# EAGLE board DRV8839 (EAGLE 6.5.0)
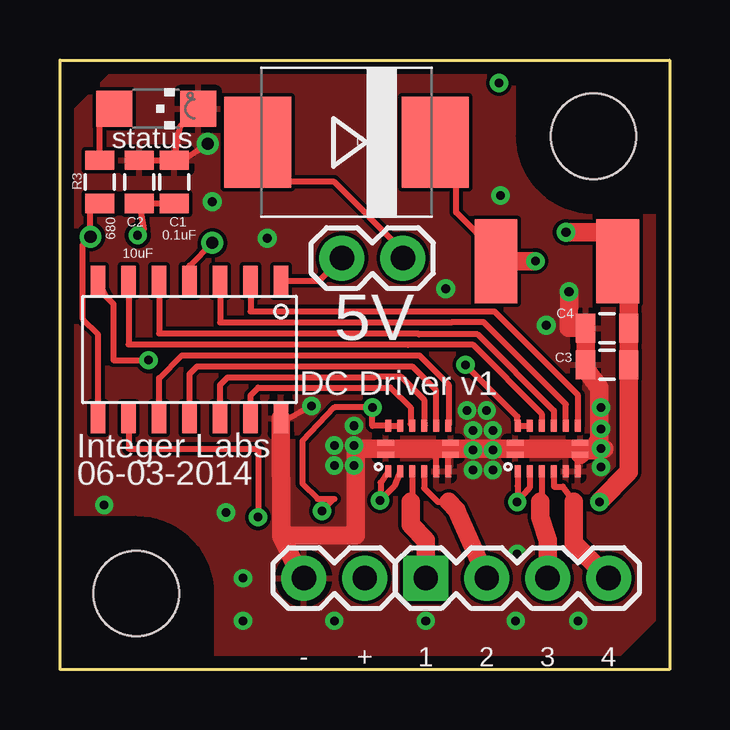
[diagram p0: board, top side]
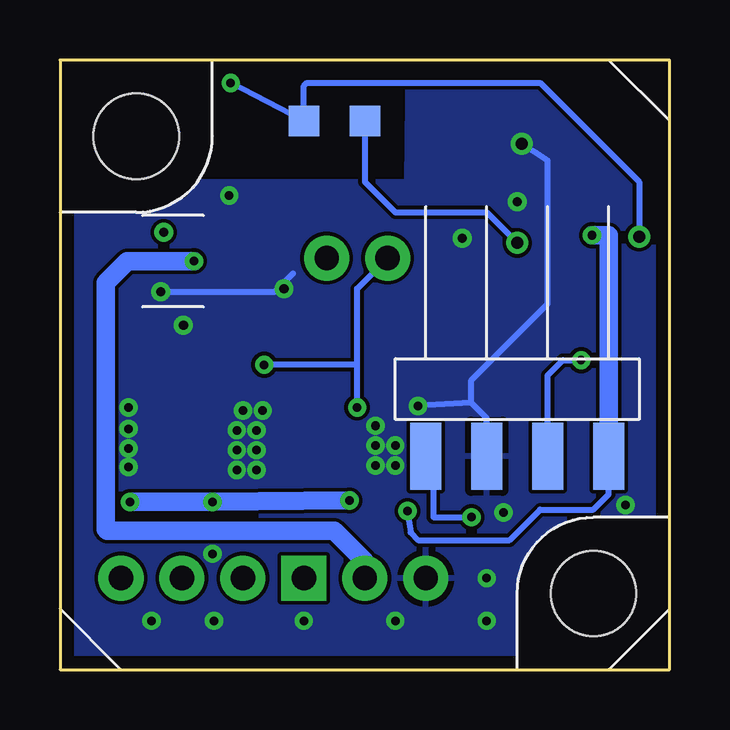
[diagram p1: board, bottom side, seen from below]

Size 25.4 x 25.4 mm. Coordinates in mm from the lower left corner, seen from the top.
Copper layers (1*16): Top 0.0178mm / dielectric 59mil / Bottom 0.0178mm
Design rules "SSC-EAGLE-2Lyr_v1.0.0.3": minimum track width 6mil, minimum drill 14mil, track to track 6mil, track to pad 6mil, pad to pad 6mil, via to via 6mil, smd to smd 6mil, copper to edge 20mil, drill to drill 16mil, minimum pad ring 8mil, minimum via ring 8mil, stop-mask expansion 3mil, vias tented up to drill 0mil, thermal gap 10mil

## Footprints (pad centres in the part's own frame; a part is rotated, then mirrored left to right if it is on the bottom)
0805 = smd 0.8 x 1.2: 1 -0.9,0; 2 0.9,0
SMC = smd 2.8 x 3.8: A 3.7,0; C -3.7,0
1X04 = drill 1.016 pad 1.88 square: 1 0,0 | drill 1.016 pad 1.88: 2 2.54,0; 3 5.08,0; 4 7.62,0
1X02 = drill 1.016 pad 1.88: 1 0,0; 2 2.54,0
CHIPLED_1206 = smd 1.5 x 1.5: A 0,-1.75; C 0,1.75
WSON-POWERPAD-12 = smd 0.25 x 0.5: 1 -1.25,-0.95; 2 -0.75,-0.95; 3 -0.25,-0.95; 4 0.25,-0.95; 5 0.75,-0.95; 6 1.25,-0.95; 7 1.25,0.95; 8 0.75,0.95; 9 0.25,0.95; 10 -0.25,0.95; 11 -0.75,0.95; 12 -1.25,0.95 | smd 0.7 x 0.25: PAD1 -1.35,0.25; PAD2 -1.35,-0.25; PAD3 1.35,-0.25; PAD4 1.35,0.25
1812 = smd 1.778 x 3.505: P$1 -2.54,0; P$2 2.54,0
SOIC14 = smd 0.61 x 1.27: 1 0,-3.175; 2 1.27,-3.175; 3 2.54,-3.175; 4 3.81,-3.175; 5 5.08,-3.175; 6 6.35,-3.175; 7 7.62,-3.175; 8 7.62,2.54; 9 6.35,2.54; 10 5.08,2.54; 11 3.81,2.54; 12 2.54,2.54; 13 1.27,2.54; 14 0,2.54
FOOTPRINT = smd 1.27 x 1.27 bottom: MISO 15.24,22.86; RESET 12.7,22.86 | smd 1.295 x 2.794 bottom: P$1 2.54,8.89; P$2 5.08,8.89; P$3 7.62,8.89; P$4 10.16,8.89 | hole 3.556: 22.225,22.225; 3.175,3.175

## Placement (x,y rotation side)
C1  0.1uF  [0805]  4.76,20.32 270 top
C2  10uF  [0805]  3.3,20.32 270 top
C3  10 uF  [0805]  22.8,12.7 180 top
C4  0.1uF  [0805]  22.8,14.22 180 top
D1  [SMC]  11.94,21.97 180 top
JP1  [1X04]  15.24,3.81 0 top
JP2  M02PTH  [1X02]  12.7,3.81 180 top
JP3  M02PTH  [1X02]  14.29,17.14 180 top
LED  blue  [CHIPLED_1206]  4,23.37 270 top
R3  680  [0805]  1.65,20.32 270 top
U$1  DRV8839  [WSON-POWERPAD-12]  14.92,9.21 0 top
U$2  FUSE  [1812]  20.7,17.02 0 top
U$3  TINY841  [SOIC14]  9.21,13.02 180 top
U$4  FOOTPRINT  [FOOTPRINT]  0,0 0 top
U$5  DRV8839  [WSON-POWERPAD-12]  20.32,9.21 0 top

## Library data of the parts
C1-C4 = SparkFun-Capacitors
D1 = SparkFun-DiscreteSemi
JP1-JP3 = SparkFun-Connectors
LED = led
R3 = SparkFun-Passives
U$1-U$5 = IntegerLabs

## Nets
EN1: U$1.9 U$3.12
EN2: U$1.7 U$3.10
EN3: U$3.5 U$5.9
EN4: U$3.2 U$5.7
GND: C1.1 C2.1 C3.2 C4.2 JP2.2 LED.C U$1.5 U$1.6 U$1.PAD1 U$1.PAD2 U$1.PAD3 U$1.PAD4 U$3.14 U$4.P$3 U$5.5 U$5.6 U$5.PAD1 U$5.PAD2 U$5.PAD3 U$5.PAD4
IN1: U$1.10 U$3.13
IN2: U$1.8 U$3.11
IN3: U$3.6 U$5.10
IN4: U$3.3 U$5.8
MISO/LED: R3.2 U$3.8 U$4.MISO
N$3: D1.A JP3.1
N$5: LED.A R3.1
OUT1: JP1.1 U$1.3
OUT2: JP1.2 U$1.4
OUT3: JP1.3 U$5.3
OUT4: JP1.4 U$5.4
RESET: U$3.4 U$4.RESET
SCL/SCK: U$3.9 U$4.P$4
SDA/MOSI: U$3.7 U$4.P$2
VCC: C1.2 C2.2 JP3.2 U$1.11 U$1.12 U$3.1 U$4.P$1 U$5.11 U$5.12
VIN: D1.C JP2.1 U$2.P$1
VM: C3.1 C4.1 U$1.1 U$1.2 U$2.P$2 U$5.1 U$5.2

## Tracks (layer width: path | path; a pad name or v marks a point on that pad's centre or on a via)
EN1
  Top 0.254: U$3.12 6.67,11.86 6.99,12.18 13.09,12.18 13.11,12.19 14.22,12.19 15.18,11.24 15.18,10.29 15.19,10.22 U$1.9
EN2
  Top 0.254: U$3.10 4.13,12.14 5.08,13.09 13.97,13.09 13.98,13.08 14.99,13.08 16.19,11.87 16.19,10.18 U$1.7
EN3
  Top 0.254: U$3.5 4.13,14.01 14.92,14.01 14.96,13.97 17.4,13.97 20.57,10.79 20.57,10.22 U$5.9
EN4
  Top 0.254: U$3.2 7.94,14.92 18.1,14.92 21.59,11.43 21.59,10.18 U$5.7
GND  (via drill 0.36, 0.38, 0.51)
  Top 0.254: U$1.PAD2 15.56,8.96 | 15.56,8.96 U$1.PAD3 | U$5.PAD4 U$5.PAD1 U$1.PAD4 U$1.PAD1 U$1.PAD2 | U$1.PAD3 U$5.PAD2 | U$1.6 16.17,8.86 U$1.PAD3 | U$5.6 21.57,8.86 U$5.PAD3 | U$1.5 15.67,8.84 15.56,8.96 | U$3.14 9.53,10.48 v10.48,10.99 | 13.02,9.21 13.32,9.21 U$1.PAD2 | 15.43,9.21 15.31,9.21 15.56,8.96 | C2.1 C1.1 | C1.1 5.02,22.63 LED.C | C1.1 5.09,21.22 v6.16,21.91
  Top 0.762: 9.21,5.58 U$3.14 | 9.21,5.58 12.32,5.59 12.32,9.21 | 15.43,9.21 14.41,9.21 | 9.21,5.58 9.97,4 JP2.2 | v21.21,15.75 21.2,14.23 C4.2 C3.2 21.9,12.52 22.48,11.75 22.48,9.59 22.23,9.14 21.86,9.14 U$5.PAD3 | 12.7,9.21 v22.54,9.21 22.67,9.21
  Bottom 0.254: U$4.P$3 7.62,10.48 8.26,11.11 | 8.26,11.11 v10.48,10.99 | v21.21,15.75 16.45,15.75 15.68,16.51 | 8.26,11.11 8.26,12.06 5.08,15.24 5.08,21.21 v6.16,21.91
  other vias: 18.35,19.75 12.26,10.16 12.26,9.33 11.43,9.33 11.43,8.51 12.26,8.51 17.21,9.97 18.03,9.97 17.21,9.14 18.03,9.14 17.21,8.32 18.03,8.32 22.54,8.45 22.54,10.03 16.95,10.79 17.78,10.79 22.54,10.92 19.05,4.83 18.99,2.03 21.59,2.03 15.24,2.03 11.43,2.03 7.62,3.81 7.62,2.03 6.92,6.54 1.84,6.86 20.26,14.35 6.35,19.49 16.07,15.88 8.64,17.97
  pour Bottom: -0.13,0.06 18.1,-0.06 25.4,0 25.4,20.32 10.92,20.32 10.86,25.4 0,25.4 0,6.48
  pour Top: 0,25.4 0,0 25.4,0 25.4,25.4
IN1
  Top 0.254: U$3.13 7.94,11.43 8.26,11.75 13.78,11.75 14.61,10.92 14.61,10.22 U$1.10
IN2
  Top 0.254: U$3.11 5.4,12.32 5.71,12.64 14.67,12.64 15.67,11.63 15.67,10.27 U$1.8
IN3
  Top 0.254: U$3.6 2.86,13.55 14.48,13.55 14.5,13.53 17.21,13.53 20.07,10.67 20.07,10.22 U$5.10
IN4
  Top 0.254: U$3.3 6.67,14.46 16.32,14.46 16.33,14.48 17.65,14.48 21.08,11.05 21.08,10.27 U$5.8
MISO/LED  (via drill 0.36, 0.51)
  Top 0.254: U$3.8 1.59,13.97 0.95,14.61 0.95,17.72 v1.27,18.03 1.27,19.04 R3.2
  Bottom 0.254: v18.29,24.45 U$4.MISO 15.24,24.32 15.11,24.45 5.4,24.45 1.27,20.32 v1.27,18.03
N$3
  Top 0.254: JP3.1 14.29,17.46 11.43,20.32 8.89,20.32 8.89,21.32 D1.A
N$5
  Top 0.254: R3.1 1.65,22.77 LED.A
OUT1
  Top 0.254: U$1.3 14.67,7.05 14.61,6.99
  Top 0.762: JP1.1 15.24,5.4 14.61,6.03 14.61,6.99
OUT2
  Top 0.254: U$1.4 15.17,8.01 15.18,8 15.18,7.56 15.75,6.99 16.19,6.99
  Top 0.762: JP1.2 16.51,6.67 16.19,6.99
OUT3
  Top 0.254: U$5.3 20.07,7.05 20,6.99
  Top 0.762: JP1.3 20.32,5.4 20,6.35 20,6.99
OUT4
  Top 0.254: U$5.4 20.57,8.01 20.57,8 20.57,7.62 20.95,7.62 21.4,6.99
  Top 0.762: JP1.4 21.4,5.27 21.4,6.99
RESET  (via drill 0.51)
  Top 0.254: U$3.4 5.4,16.83 v6.35,17.78
  Bottom 0.254: 12.7,22.54 U$4.RESET 12.7,20.32 11.43,19.05 7.62,19.05 v6.35,17.78
SCL/SCK  (via drill 0.36)
  Top 0.254: U$3.9 2.86,9.21 8.26,9.21 v8.26,6.35
  Bottom 0.254: U$4.P$4 9.84,8.89 9.84,6.35 v8.26,6.35
SDA/MOSI  (via drill 0.36)
  Top 0.254: U$3.7 1.91,15.56 2.22,15.24 2.22,12.89 v3.68,12.89
  Bottom 0.254: U$4.P$2 5.08,12.26 4.45,12.89 v3.68,12.89
VCC  (via drill 0.36)
  Top 0.254: U$1.11 U$1.12 13.02,10.16 v13.02,10.92 11.43,10.92 10.1,9.53 10.1,7.75 10.73,7.11 11.43,7.11 v10.92,6.6 | U$5.11 U$5.12 19.05,10.54 v16.89,12.7 | U$3.1 10.79,16.19 JP3.2 | C1.2 C2.2 3.49,18.35 v3.24,18.1
  Bottom 0.254: v13.02,10.92 13.02,12.7 | 13.02,12.7 v16.89,12.7 | v10.92,6.6 10.79,5.71 10.48,5.4 6.67,5.4 5.4,6.67 3.17,6.67 2.54,7.3 U$4.P$1 | 13.02,12.7 13.02,15.88 JP3.2
  Bottom 0.762: v3.24,18.1 2.54,18.1 U$4.P$1
VIN  (via drill 0.36)
  Top 0.254: U$2.P$1 18.16,17.4 16.51,19.05 16.51,21.1 D1.C
  Top 0.762: U$2.P$1 v19.81,17.02
  Bottom 0.762: JP2.1 12.7,4.51 13.97,5.78 23.43,5.78 23.5,5.84 23.5,16.13 22.61,17.02 v19.81,17.02
VM  (via drill 0.36, 0.38)
  Top 0.254: U$5.1 19.07,7.64 v19.05,6.99 19.49,7.49 19.57,7.57 U$5.2 | U$1.1 13.36,7.79 v13.34,7.05 13.92,7.63 U$1.2
  Top 0.762: v21.08,18.22 22.67,18.22 23.18,17.72 U$2.P$2 23.7,16.56 C4.1 C3.1 23.7,8.24 v22.48,6.99
  Bottom 0.762: v13.34,7.05 v19.05,6.99 v22.48,6.99

## Text on the board
tPlace: status | 5V | DC Driver v1 | Integer Labs | 06-03-2014
tNames: - | + | 1 | 2 | 3 | 4